# Altium PCB Video.PcbDoc
Units mm, origin at the board's own origin, x right, y up, seen from the top; angles counter-clockwise.
Board outline 68.58 x 35.56 mm, 4 copper layers (Top Layer, Signal Layer 1, Signal Layer 2, Bottom Layer), stack 0.603 mm thick; 43 components, 26 nets, 145 pads, 8 vias.
Unrouted connection lines stored in the file: 4.
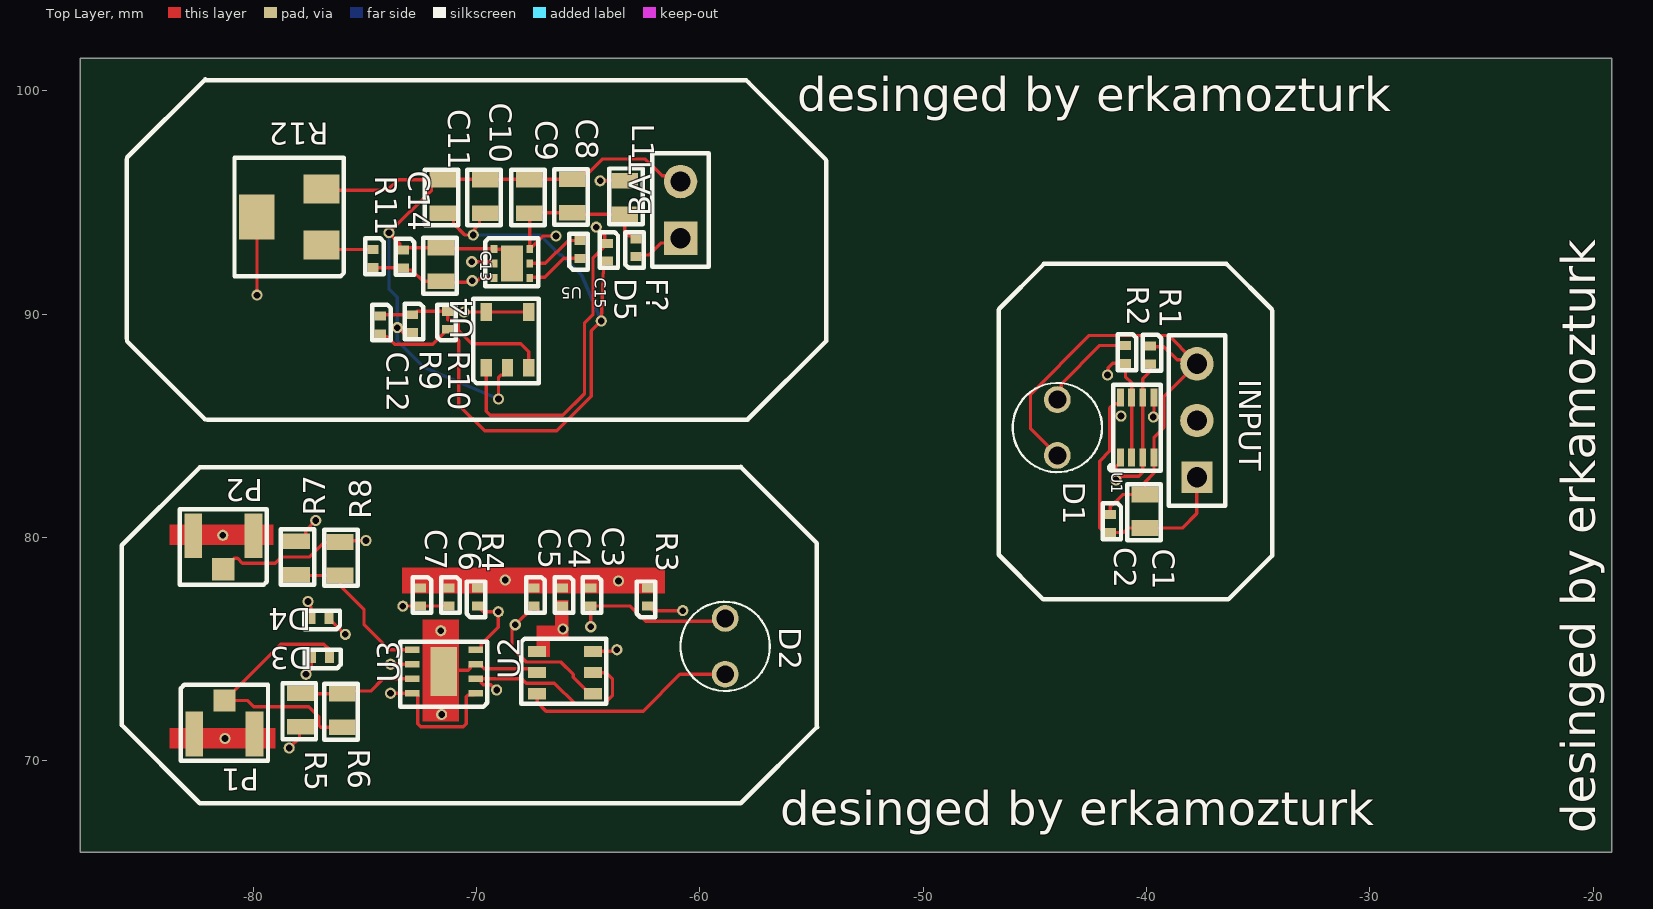
[diagram p0: Top Layer view]
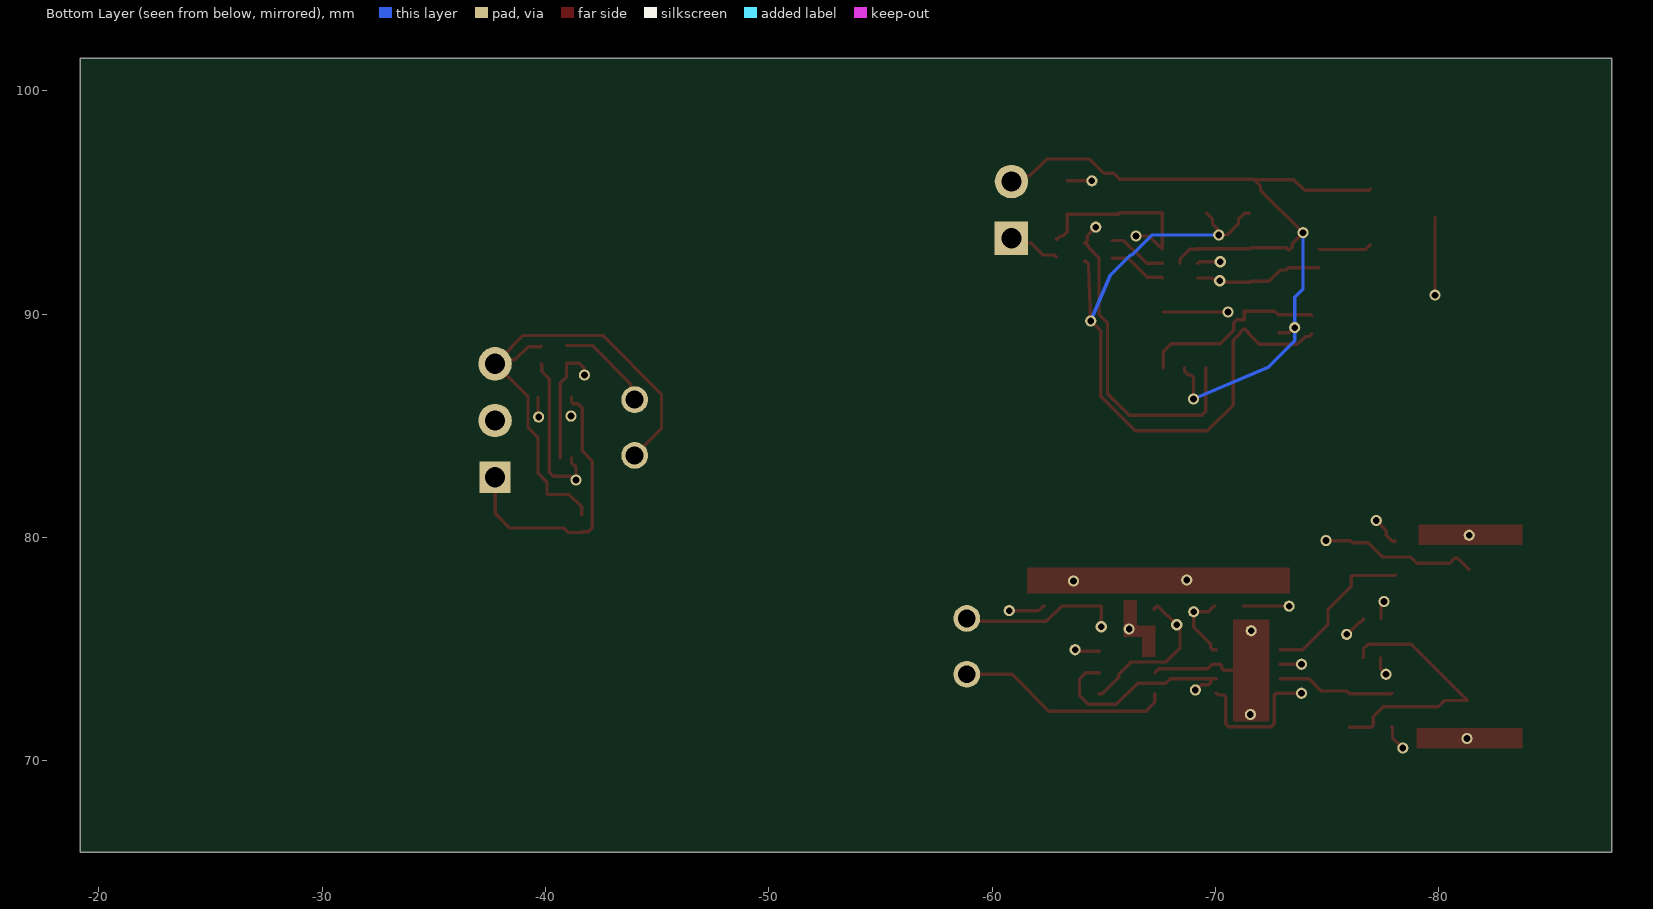
[diagram p1: Bottom Layer view, seen from below]
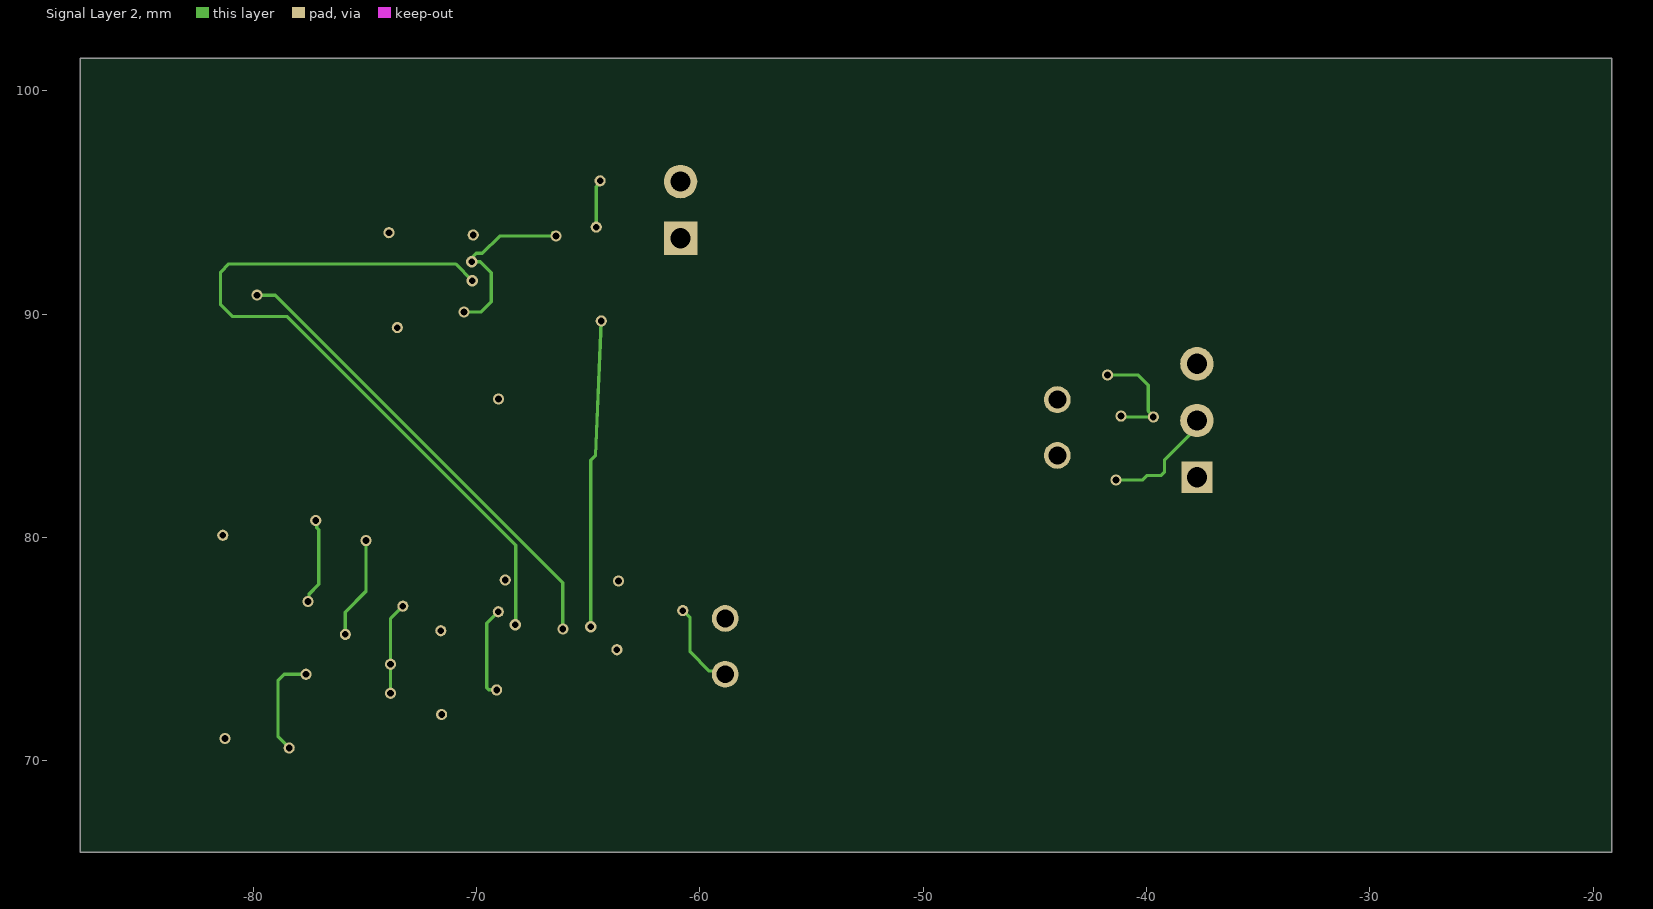
[diagram p2: Signal Layer 2]
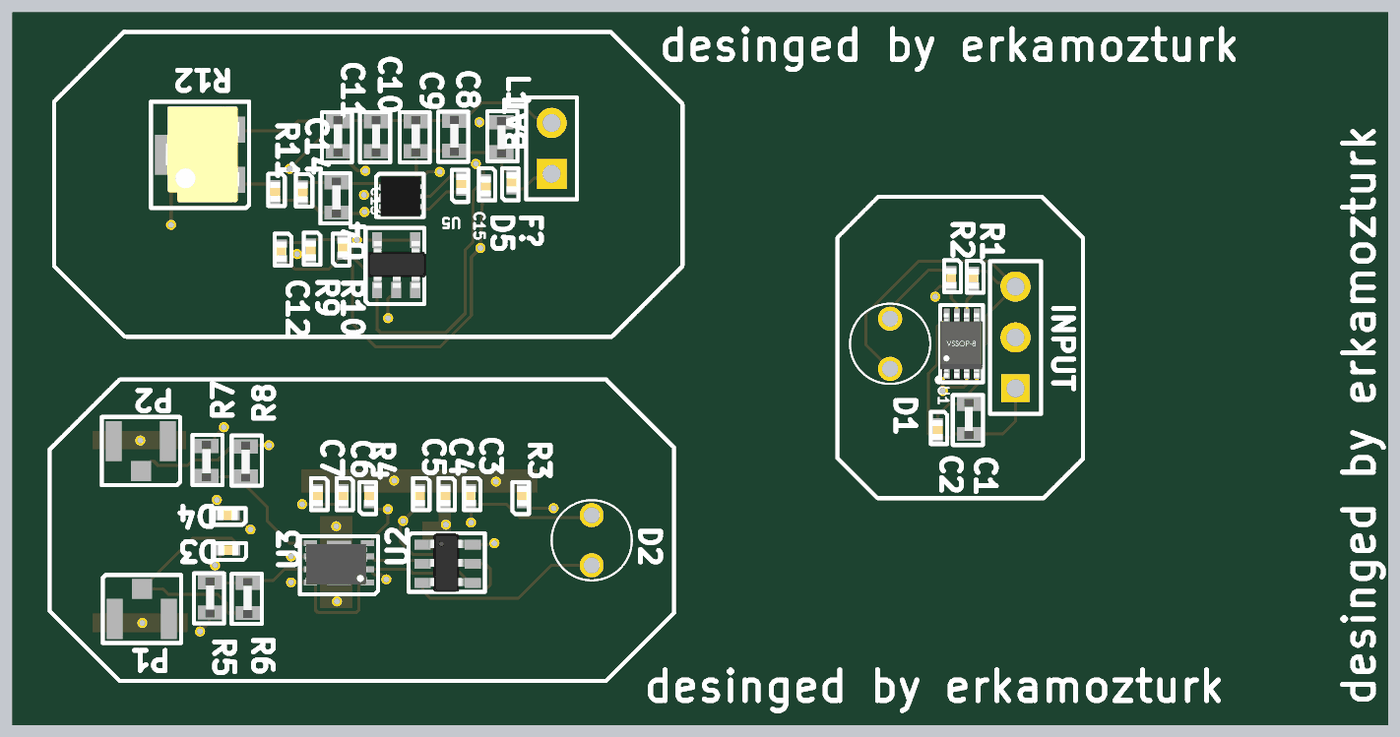
[diagram p3: 3D render of the assembled board from above, using the file's embedded part models]

## Layer stack, top to bottom
Top Solder: solder mask 0.0102, Solder Resist, Dk 3.5
Top Layer: signal copper 0.0356
Dielectric 1: prepreg 0.0711, PP-006, Dk 4.1
Signal Layer 1: signal copper 0.035
Dielectric 2: dielectric 0.32, FR-4, Dk 4.8
Signal Layer 2: signal copper 0.035
Dielectric 3: prepreg 0.0711, PP-006, Dk 4.1
Bottom Layer: signal copper 0.0356
Bottom Solder: solder mask 0.0102, Solder Resist, Dk 3.5

## Board outline
-87.75,65.9 -87.75,101.46 -19.17,101.46 -19.17,65.9

## Design rules (kind name [scope] priority, off if disabled: settings)
AssemblyTestPointUsage [All] p1 off:
AssemblyTestpoint [All] p1 off: testpointundercomponent=TRUE minsize=1.016 maxsize=2.54 preferedsize=1.524 minholesize=0 maxholesize=1.016 preferedholesize=0.813 testpointgrid=0.025 usegrid=TRUE gridtolerance=0 allowsidetop=TRUE allowsidebottom=TRUE
Clearance [All] p1: gap=0.15 ignorepadtopadclearanceinfootprint=FALSE
ComponentClearance [All] p1 off: gap=0.254 collisioncheckmode=3 verticalgap=0.254 showdistances=FALSE
DiffPairsRouting [All] p1 off: maxlimit=0.254 minlimit=0.254 mostfreqgap=0.254 toplayer_minwidth=0.381 toplayer_maxwidth=0.381 toplayer_prefwidth=0.381 midlayer1_minwidth=0.381 midlayer1_maxwidth=0.381 midlayer1_prefwidth=0.381 midlayer2_minwidth=0.381 midlayer2_maxwidth=0.381 midlayer2_prefwidth=0.381 bottomlayer_minwidth=0.381 bottomlayer_maxwidth=0.381 bottomlayer_prefwidth=0.381 maxuncoupledlength=12.7
FabricationTestPointUsage [All] p1 off: valid=0 allowmultiple=FALSE
FabricationTestpoint [All] p1 off: side=3 testpointundercomponent=TRUE minsize=1.016 maxsize=2.54 preferedsize=1.524 minholesize=0 maxholesize=1.016 preferedholesize=0.813 testpointgrid=0.025 allowsidetop=TRUE allowsidebottom=TRUE usegrid=TRUE gridtolerance=0
FanoutControl Fanout_BGA [IsBGA] p1 off: bgadir=Out bgaviamode=Centered fanoutstyle=Auto fanoutdirection=Alternating viagrid=0.025 // Fanout_BGA (Default Rule)
FanoutControl Fanout_LCC [IsLCC] p2 off: bgadir=Out bgaviamode=Centered fanoutstyle=Auto fanoutdirection=Alternating viagrid=0.025 // Fanout_LCC (Default Rule)
FanoutControl Fanout_SOIC [IsSOIC] p3 off: bgadir=Out bgaviamode=Centered fanoutstyle=Auto fanoutdirection=Alternating viagrid=0.025 // Fanout_SOIC (Default Rule)
FanoutControl Fanout_Small [(CompPinCount < 5)] p4 off: bgadir=Out bgaviamode=Centered fanoutstyle=Auto fanoutdirection=OutThenIn viagrid=0.025 // Fanout_Small (Default Rule)
FanoutControl Fanout_Default [All] p5 off: bgadir=Out bgaviamode=Centered fanoutstyle=Auto fanoutdirection=Alternating viagrid=0.025 // Fanout_Default (Default Rule)
Height [All] p1 off: minheight=0 maxheight=25.4 prefheight=12.7
HoleSize [All] p1 off: absolutevalues=TRUE maxlimit=2.54 minlimit=0.025 maxpercent=80.000 minpercent=20.000
HoleToHoleClearance [All] p1 off: gap=0.254 allowstackedmicrovias=TRUE
LayerPairs [All] p1 off: enforce=TRUE
MinimumSolderMaskSliver [All] p1 off: minsoldermaskwidth=0.254
NetAntennae [All] p1 off: netantennaetolerance=0
PasteMaskExpansion [All] p1 off: expansion=0
PlaneClearance [All] p1 off: clearance=0.508
PlaneConnect [All] p1 off: planeconnectstyle=Direct reliefexpansion=0.508 reliefentries=4 reliefconductorwidth=0.254 reliefairgap=0.254
PolygonConnect [All] p1: connectstyle=Relief reliefconductorwidth=0.254 reliefentries=4 polygonreliefangle="90 Angle" airgapwidth=0.254
RoutingCorners [All] p1 off: cornerstyle=45-Degree minsetback=2.54 maxsetback=2.54
RoutingLayers [All] p1 off: top layer_v5=TRUE mid layer 1_v5=TRUE mid layer 2_v5=TRUE bottom layer_v5=TRUE
RoutingPriority [All] p1 off: routingpriority=0
RoutingTopology [All] p1 off: topology=Shortest
RoutingVias [All] p1: holewidth=0.3 width=0.5 viastyle="Through Hole" minholewidth=0.3 minwidth=0.5 maxholewidth=0.2 maxwidth=0.8
SilkToSilkClearance [All] p1 off: silktosilkclearance=0.254
SilkToSolderMaskClearance [IsPad] p1 off: minsilkscreentomaskgap=0.254 clearancetoexposedcopper=TRUE
SolderMaskExpansion [All] p1 off: expansion=0
UnpouredPolygon [All] p1 off:
Width [All] p1: maxlimit=0.5 minlimit=0.15 preferedwidth=0.15
3 further rules are at their usual default settings.

## Components (designator, comment, footprint, x,y, rotation, side; value= is the part's Value field where it differs from the comment)
BAT "P1" HDR1X2 -60.87,93.4 r90 top
C1 "Cap" 0805-FW -40.07,81.176 r270 top value=100pF
C2 "Cap" 0402 -41.62,80.625 r270 top value=100pF
C3 "Cap" 0402 -64.89,77.33 r270 top value=100pF
C4 "Cap" 0402 -66.16,77.33 r270 top value=100pF
C5 "Cap" 0402 -67.43,77.33 r270 top value=100pF
C6 "Cap" 0402 -71.24,77.33 r270 top value=100pF
C7 "Cap" 0402 -72.51,77.33 r270 top value=100pF
C8 "Cap" 0805-FW -65.72,95.3 r270 top value=100pF
C9 "Cap" 0805-FW -67.645,95.275 r270 top value=100pF
C10 "Cap" 0805-FW -69.62,95.275 r270 top value=100pF
C11 "Cap" 0805-FW -71.52,95.275 r270 top value=100pF
C12 "Cap" 0402 -74.32,89.526 r270 top value=100pF
C13 "Cap" 0805-FW -71.595,92.225 r270 top value=100pF
C14 "Cap" 0402 -73.27,92.475 r270 top value=100pF
C15 "Cap" 0402 -65.37,92.9 r90 top value=100pF
D1 "LED0" T1 -43.995,86.175 r270 top
D2 "Photo Sen" T1 -58.87,73.875 r90 top
D3 "Diode" 0402 -76.995,74.625 r180 top
D4 "Diode" 0402 -77.02,76.375 r180 top
D5 "Diode" 0402 -64.145,92.775 r270 top
F? "Fuse 1" 0402 -62.87,92.975 r90 top
INPUT "Header 3" HDR1X3 -37.745,82.7 r90 top
L1 "Inductor" 0805-FW -63.367,95.225 r90 top value=10mH
P1 "BNC" UFL -83.045,72.2 r0 top
P2 "BNC" UFL -79.595,79.075 r180 top
R1 "Res2" 0402 -39.82,88.175 r270 top value=1K
R2 "Res2" 0402 -40.945,88.2 r270 top value=1K
R3 "Res2" 0402 -62.35,77.33 r90 top value=1K
R4 "Res2" 0402 -69.97,77.33 r90 top value=1K
R5 "Res2" 0805-FW -77.895,72.275 r270 top value=1K
R6 "Res2" 0805-FW -76.02,72.25 r270 top value=1K
R7 "Res2" 0805-FW -78.07,79.076 r90 top value=1K
R8 "Res2" 0805-FW -76.12,79.05 r90 top value=1K
R9 "Res2" 0402 -72.87,89.576 r270 top value=1K
R10 "Res2" 0402 -71.295,89.726 r90 top value=1K
R11 "Res2" 0402 -74.645,92.5 r270 top value=1K
R12 "RPot" PVG5A -76.145,92.45 r180 top value=1K
U1 "74LVC3G0" DUC8 -41.32,83.175 r90 top
U2 "TLV2501" SOT236 -67.295,74.9 r0 top
U3 "UCC275" DFN8 -69.72,72.875 r180 top
U4 "LMR62421" SOT235 -69.57,87.6 r90 top
U5 "TPS60150" DFN6 -69.345,93.1 r0 top

## Footprints (in the part's own frame and the unit in brackets; to place one, negate y for a bottom-side part, rotate by r counter-clockwise, add the part's x,y. Pads: shape width x height; smd on the part's side, far side on the other; paste and mask are expansions set on the pad)
0402 [mm]
  rect 0.4x0.5 smd mask+0: 1(-0.4,0) 2(0.4,0)
  silkscreen extent -0.9,-0.35 0.7,0.48, body extent -0.5,-0.25 0.5,0.25, height 0.55
0805-FW [mm]
  rect 0.7x1.2 smd mask+0: 1(-0.75,0) 2(0.75,0)
  silkscreen extent -1.2,-0.8 1.3,0.7, body extent -1,-0.23 1,0.23, height 1.23
DFN6 [mm]
  rect 0.3x0.35 smd: 1(0.125,-0.175) 2(0.125,-0.825) 3(0.125,-1.475) 4(1.725,-1.475) 5(1.725,-0.825) 6(1.725,-0.175)
  rect 1x1.6 smd paste+0 mask+0: 1(0.925,-0.825)
  silkscreen extent -0.28,-1.85 2.1,0.3, body extent -0.11,-1.84 1.98,0.16, height 0.81
DFN8 [mm]
  rect 1.2x2.2 smd: 0(1.75,-1.125)
  rect 0.65x0.3 smd: 1(0.325,-0.15) 2(0.325,-0.8) 3(0.325,-1.45) 4(0.325,-2.1) 5(3.175,-2.1) 6(3.175,-1.45) 7(3.175,-0.8) 8(3.175,-0.15)
  silkscreen extent -0.2,-2.45 3.7,0.45, body extent 0.37,-2.05 3.41,-0.05, height 0.91
DUC8 [mm]
  rect 0.8x0.3 smd mask+0.07: 1(0.4,-0.15) 2(0.4,-0.65) 3(0.4,-1.15) 4(0.4,-1.65) 5(3.1,-1.65) 6(3.1,-1.15) 7(3.1,-0.65) 8(3.1,-0.15)
  silkscreen extent -0.18,-1.95 3.67,0.35, body extent 0.08,-1.93 3.28,0.17, height 0.91
HDR1X2 [mm] "Connector; Header; 2 Position"
  rect 1.5x1.5 hole 0.9: 1(0,0)
  round 1.5 hole 0.9: 2(2.54,0)
  silkscreen extent -1.27,-1.27 3.81,1.27
HDR1X3 [mm] "Connector; Header; 3 Position"
  rect 1.4x1.4 hole 0.9: 1(0,0)
  round 1.5 hole 0.9: 2(2.54,0) 3(5.08,0)
  silkscreen extent -1.27,-1.27 6.35,1.27
PVG5A [mm] "TRIM POT"
  rect 1.6x1.3 smd: 1(0.8,-0.65) 2(0.8,-3.15)
  rect 1.6x2 smd: 3(3.7,-1.9)
  silkscreen extent -0.2,-4.55 4.7,0.75, body extent 0.28,-4.33 3.97,0.47, height 5.61
SOT235 [mm]
  rect 0.8x0.5 smd: 1(0,0) 2(0,-0.95) 3(0,-1.9) 4(2.5,-1.9) 5(2.5,0)
  silkscreen extent -0.7,-2.35 3.1,0.58, body extent 0.1,-2.44 2.44,0.48, height 1.01
SOT236 [mm]
  rect 0.8x0.5 smd: 1(0,0) 2(0,-0.95) 3(0,-1.9) 4(2.5,-1.9) 5(2.5,-0.95) 6(2.5,0)
  silkscreen extent -0.7,-2.35 3.1,0.58, body extent 0,-2.36 2.34,0.56
T1 [mm] "3mm 5mm r=1.5 w=0.1"
  round 1.2 hole 0.8: 1(0,0) 2(2.5,0)
  silkscreen extent -0.75,-2 3.25,2
UFL [mm]
  rect 1x1 smd: 1(1.75,0.5)
  rect 0.8x2 smd: 2(0.4,-1) 2(3.1,-1)
  silkscreen extent -0.2,-2.2 3.7,1.2

## Part data
BAT: library part "Header 2", "Header, 2-Pin", LatestRevisionDate=17-Jul-2002, LatestRevisionNote="Re-released for DXP Platform.", Publisher="Altium Limited"
C1 C2 C3 C4 C5 C6 C7 C8 C9 C10 C11 C12 C13 C14 C15: "Capacitor", LatestRevisionDate=17-Jul-2002, LatestRevisionNote="Re-released for DXP Platform.", PackageDescription="Radial Cap, Thru-Hole; 2 Leads; 0.3 in Pin Spacing", PackageReference=RAD-0.3, Published=8-Jun-2000, Publisher="Altium Limited"
D1: "Typical INFRARED GaAs LED", LatestRevisionDate=08-Jul-2005, LatestRevisionNote="Mech Layer 1 removed.", PackageDescription="LED; 2 Leads", PackageReference=LED-0, Published=8-Jun-2000, Publisher="Altium Limited"
D2: "Photosensitive Diode", LatestRevisionDate=17-Jul-2002, LatestRevisionNote="Re-released for DXP Platform.", PackageReference=PIN2, Published=24-Mar-1999, Publisher="Altium Limited"
D3 D4 D5: "Default Diode", Code_JEDEC=DO-214-AB, LatestRevisionDate=17-Jul-2002, LatestRevisionNote="Re-released for DXP Platform.", PackageDescription="DO-214-AB/SMC; 2 C-Bend Leads; Body 7.9 x 5.9 mm, inc. leads (LxW)", PackageReference=SMC, PackageVersion=Sep-1996, Published=8-Jun-2000, Publisher="Altium Limited"
F?: "Fuse", LatestRevisionDate=17-Jul-2002, LatestRevisionNote="Re-released for DXP Platform.", PackageDescription="Thru-Hole; 2 Leads", PackageReference=PIN-W2/E2.8, Published=8-Jun-2000, Publisher="Altium Limited"
INPUT: "Header, 3-Pin", LatestRevisionDate=17-Jul-2002, LatestRevisionNote="Re-released for DXP Platform.", Publisher="Altium Limited"
P1 P2: "BNC Elbow Connector", LatestRevisionDate=17-Jul-2002, LatestRevisionNote="Re-released for DXP Platform.", Publisher="Altium Limited"
R1 R2 R3 R4 R5 R6 R7 R8 R9 R10 R11: "Resistor", LatestRevisionDate=17-Jul-2002, LatestRevisionNote="Re-released for DXP Platform.", PackageDescription="Axial Device, Thru-Hole; 2 Leads; 0.4 in Pin Spacing", PackageReference=AXIAL-0.4, Published=8-Jun-2000, Publisher="Altium Limited"
R12: "Potentiometer", LatestRevisionDate=17-Jul-2002, LatestRevisionNote="Re-released for DXP Platform.", PackageDescription="Variable Resistor, Thru-Hole; 3 Leads", PackageReference=VR5, Published=8-Jun-2000, Publisher="Altium Limited", Set Position=0.5, Sim Note="Enter the Resistance value and the set point into parameter fields."
L1: Code_IEC=1005, Code_JEITA=0402, LatestRevisionDate=29-May-2009, LatestRevisionNote="IPC-7351 Footprint Added.", PackageDescription="Chip Inductor", PackageReference=0402-A, Published=8-Jun-2000, Publisher="Altium Limited"

## Free pads (board coordinates)
  round 0.5 hole 0.3: 2(-81.37,80.1) 2(-81.27,71) 2(-78.395,70.575) 2(-77.645,73.875) 2(-77.556,77.138) 2(-77.206,80.763) 2(-75.881,75.663) 2(-74.956,79.863) 2(-73.929,93.65) 2(-73.856,73.025) 2(-73.856,74.325) 2(-73.554,89.4) 2(-73.306,76.925) 2(-71.606,75.825) 2(-71.57,72.075) 2(-70.154,93.55) 2(-69.106,73.175) 2(-69.031,76.675) 2(-69.02,86.204) 2(-68.72,78.1) 2(-64.645,93.9) 2(-64.47,95.975) 2(-64.42,89.7) 2(-63.72,74.975) 2(-63.645,78.05) 2(-60.77,76.725) 2(-41.745,87.275) 2(-41.37,82.575) 2(-41.145,85.438) 2(-39.695,85.4)

## Via types
v1: diameter 0.5, hole 0.3, Top Layer to Bottom Layer, 8 vias

## Nets (pads, with @x,y where several pads share a name; then routed paths per layer and width w, separated by ;. In a path a pad name is that pad's centre, name@x,y a point inside that pad or via, vN(x,y) a via of type N, cw(c..) or ccw(c..) an arc to the next point about the centre after c; other vN are vias at no path point)
5V: C5.2 C13.2 C14.2 R11.2 U2.4 U5.3 | length 47.1
  Top Layer w0.15: R11.2 -74.62,92.075 C14.2 -73.173,91.979 -72.898,91.979 -72.395,91.475 C13.2 -71.545,91.425 v1@-70.195,91.425 ; v1@-70.045,91.425 -69.845,91.625 U5.3 ; v1@-68.42,76.09 -68.42,75.057 -67.788,74.425 -66.238,74.425 -65.679,73.866 -65.679,73.735 -64.945,73 U2.4 ; v1(-68.27,76.09) C5.2 -67.38,76.93 -67.255,76.805 C5.2@-67.255,76.755
  Signal Layer 2 w0.15: v1(-70.195,91.5) -70.945,92.25 -81.095,92.25 -81.47,91.875 -81.47,90.425 -80.945,89.9 -78.494,89.9 -68.245,79.651 -68.245,76.115 v1(-68.27,76.09)
15V: C3.2 C10.2 C11.2 C12.2 D2.2 D5.2 pad.2@-64.42,89.7 pad.2@-70.154,93.55 R10.1 | length 52.5
  Top Layer w0.15: C12.2 -74.195,89.001 -74.02,89.001 -73.67,88.65 -71.97,88.65 -71.47,89.151 -71.47,89.201 -71.345,89.326 R10.1 -71.245,89.326 -71.12,89.201 -71.12,89.151 -70.795,88.826 -70.795,85.925 -69.645,84.775 -66.42,84.775 -64.87,86.325 -64.87,89.25 -64.42,89.7 -64.32,92.11 -64.32,92.25 -64.195,92.375 D5.2 ; C11.2 -71.311,94.525 -71.036,94.25 -71.036,94.041 -70.545,93.55 -70.154,93.55 -70.087,93.617 -70.087,93.833 -69.87,94.05 -69.87,94.275 C10.2 ; v1(-64.89,76.005) C3.2 -63.118,76.93 -62.438,76.25 -58.995,76.25 D2.2
  Signal Layer 2 w0.15: v1(-64.89,76.005) -64.89,83.455 -64.679,83.666 pad.2@-64.42,89.7
  Bottom Layer w0.15: pad.2@-70.154,93.55 -67.167,93.55 -66.267,92.65 -66.195,92.65 -65.295,91.75 pad.2@-64.42,89.7
all_As: INPUT.2 pad.2@-41.37,82.575 R1.2 U1.1 U1.3 U1.6 | length 13
  Top Layer w0.15: U1.1 -41.17,83.325 -41.245,83.25 -41.282,83.25 -41.37,83.163 -41.37,82.575 -41.282,82.575 -41.107,82.75 -40.345,82.75 -40.17,82.925 U1.3 U1.6 -40.17,87.1 -39.832,87.438 -39.832,87.763 R1.2 ; INPUT.2@-37.745,84.925 INPUT.2
  Signal Layer 2 w0.15: pad.2@-41.37,82.575 -40.195,82.575 -39.995,82.775 -39.37,82.775 -39.195,82.95 -39.195,83.475 -37.745,84.925 INPUT.2
all_Ys: pad.2@-39.695,85.4 pad.2@-41.145,85.438 pad.2@-41.745,87.275 R2.2 U1.2 U1.5 U1.7 | length 11.4
  Top Layer w0.15: pad.2@-41.745,87.275 -41.709,87.311 -41.709,87.611 -41.52,87.8 R2.2 -40.945,87.201 -40.67,86.926 U1.7 U1.2 ; pad.2@-39.695,85.4 -39.67,85.425 U1.5
  Signal Layer 2 w0.15: pad.2@-41.745,87.275 -40.37,87.275 -39.92,86.825 -39.92,85.663 -39.695,85.438 -39.695,85.4 -41.107,85.4 pad.2@-41.145,85.438
Bat: C8.2 C9.2 F?.2 L1.1 U4.4 U4.5 U5.2 U5.6 | length 21.1
  Top Layer w0.15: v1(-70.57,90.1) U4.5 U4.4 ; v1(-70.22,92.35) -69.295,92.35 U5.2 ; U5.6 U5.6@-67.62,92.95 ; v1(-66.445,93.5) -67.045,93.5 -67.52,93.025 -67.545,93.025 U5.6@-67.62,92.95 ; F?.2 -62.895,93.35 -63.045,93.5 -63.167,93.5 -63.367,93.7 L1.1 -65.645,94.475 C8.2 -67.62,94.55 C9.2 -67.62,94.5 U5.6@-67.62,92.95
  Signal Layer 2 w0.15: v1(-70.57,90.1) -69.795,90.1 -69.345,90.55 -69.345,91.85 -69.845,92.35 v1(-70.22,92.35) -70.153,92.417 -70.153,92.592 -70.02,92.725 -69.745,92.725 -68.97,93.5 v1(-66.445,93.5) v1@-66.595,93.65
FB: C12.1 R9.1 R10.2 U4.3 | length 8.6
  Top Layer w0.15: C12.1 -74.27,89.976 R9.1 -72.82,89.976 -72.67,90.126 R10.2 -71.295,89.751 -70.952,89.751 -70.82,89.619 -70.82,89.275 -70.22,88.675 -68.02,88.675 -67.67,88.325 U4.3
GND: C3.1 C4.1 C5.1 C6.1 C7.1 P1.2 P2.2 pad.2@-63.72,74.975 pad.2@-63.645,78.05 pad.2@-68.72,78.1 pad.2@-71.57,72.075 pad.2@-71.606,75.825 pad.2@-81.27,71 pad.2@-81.37,80.1 R3.2 R4.2 U2.2 U2.6 U3.0 U3.3 | length 6.1
  Top Layer w0.15: pad.2@-71.606,75.825 -71.606,75.731 -71.47,75.594 ; U3.0@-71.57,73.9 U3.0 -71.42,74.05 -70.383,74.05 -70.295,74.138 -70.295,74.25 -70.22,74.325 -69.87,74.325 -69.67,74.125 -67.47,74.125 U2.2 ; U2.6 -63.89,74.9 -63.815,74.975 pad.2@-63.72,74.975
Ind2SW: D5.1 L1.2 pad.2@-64.47,95.975 pad.2@-64.645,93.9 U4.1 | length 18.2
  Top Layer w0.15: U4.1 -69.57,85.651 -69.394,85.475 -66.144,85.475 -65.17,86.45 -65.17,89.622 -64.789,90.003 -64.789,92.531 -64.32,93 -64.32,93.05 -64.195,93.175 D5.1 -64.257,93.288 -64.257,93.513 pad.2@-64.645,93.9 ; pad.2@-64.47,95.975 L1.2
  Signal Layer 2 w0.15: pad.2@-64.645,93.9 -64.645,95.713 -64.47,95.888 pad.2@-64.47,95.975
Led_Driver: D1.1 R2.1 | length 4.4
  Top Layer w0.15: D1.1 -43.824,86.346 -43.824,86.871 -42.095,88.6 R2.1
NetBAT_1: BAT.1 F?.1 | length 2.3
  Top Layer w0.15: F?.1 -62.795,92.65 -62.295,92.65 -61.757,93.188 -61.082,93.188 BAT.1
NetBAT_2: BAT.2 C8.1 C9.1 C10.1 C11.1 C13.1 C14.1 pad.2@-69.02,86.204 pad.2@-73.554,89.4 pad.2@-73.929,93.65 R9.2 R12.2 U4.2 U5.1 | length 39.5
  Top Layer w0.15: R12.2 -76.895,95.55 -73.995,95.55 -73.52,96.025 C11.1@-71.746,96.025 ; pad.2@-73.554,89.4 -73.516,89.4 -73.291,89.176 R9.2 ; pad.2@-69.02,86.204 -69.02,87.188 -68.932,87.275 -68.795,87.275 -68.62,87.45 U4.2 ; U5.1@-68.42,92.275 -68.42,92.487 -68.845,92.912 -69.207,92.912 -69.22,92.925 -71.545,92.925 C13.1 -73.17,92.975 C14.1 -73.32,92.875 -73.445,93 -73.445,93.166 -73.929,93.65 -72.021,95.558 -72.021,95.75 C11.1@-71.746,96.025 ; BAT.2 -61.127,96.197 -61.692,96.197 -62.445,96.95 -64.37,96.95 -65.011,96.31 -65.461,96.31 C8.1 -71.721,96.05 C11.1@-71.746,96.025
  Bottom Layer w0.15: pad.2@-73.929,93.65 -73.929,91.135 -73.554,90.76 -73.554,89.4 -73.554,88.81 -72.37,87.625 pad.2@-69.02,86.204
NetC1_1: C1.1 C2.1 D1.2 INPUT.3 R1.1 U1.4 | length 23.5
  Top Layer w0.15: D1.2@-43.895,83.675 D1.2 -45.195,84.875 -45.195,86.425 -42.57,89.05 -39.015,89.05 INPUT.3@-37.927,87.963 ; C2.1 -41.62,81.375 -41.07,81.926 C1.1 -40.07,82.475 -39.67,82.875 U1.4 -39.67,84.475 -39.22,84.925 -39.22,86.305 INPUT.3 INPUT.3@-37.927,87.963 ; R1.1 -39.795,88.55 -39.22,88.55 -38.632,87.963 INPUT.3@-37.927,87.963
NetC15_1: C15.1 U5.4 | length 2.6
  Top Layer w0.15: U5.4 -67.595,91.65 -66.945,91.65 -66.095,92.5 C15.1
NetC15_2: C15.2 U5.5 | length 2.7
  Top Layer w0.15: U5.5 -66.92,92.275 -65.895,93.3 C15.2
NetD3_1: D3.1 P1.1 R6.2 | length 12.2
  Top Layer w0.15: D3.1 -76.632,74.663 -76.632,75.013 -76.845,75.225 -78.77,75.225 P1.1 -80.258,72.701 -79.983,72.425 -77.527,72.425 -77.07,71.969 -77.07,71.588 -76.982,71.5 R6.2
NetD3_2: D3.2 pad.2@-77.645,73.875 pad.2@-78.395,70.575 R5.2 | length 6.6
  Top Layer w0.15: pad.2@-78.395,70.575 -77.932,71.038 -77.932,71.488 R5.2 ; pad.2@-77.645,73.875 -77.645,73.888 -77.395,74.138 D3.2
  Signal Layer 2 w0.15: pad.2@-78.395,70.575 -78.895,71.075 -78.895,73.6 -78.62,73.875 pad.2@-77.645,73.875
NetD4_1: D4.1 P2.1 pad.2@-74.956,79.863 pad.2@-75.881,75.663 R8.2 | length 12.8
  Top Layer w0.15: P2.1 -80.85,79.07 -80.708,79.07 -80.488,78.85 -79.026,78.85 -78.751,79.125 -77.502,79.125 -76.857,79.77 -76.15,79.77 R8.2 -76.057,79.863 pad.2@-74.956,79.863 ; D4.1 -76.62,76.325 -76.495,76.2 -76.445,76.2 -75.907,75.663 pad.2@-75.881,75.663
  Signal Layer 2 w0.15: pad.2@-75.881,75.663 -75.881,76.664 -74.956,77.589 pad.2@-74.956,79.863
NetD4_2: D4.2 pad.2@-77.206,80.763 pad.2@-77.556,77.138 R7.2 | length 6.1
  Top Layer w0.15: R7.2 -77.932,79.826 -77.657,80.101 -77.657,80.313 pad.2@-77.206,80.763 ; pad.2@-77.556,77.138 -77.556,77.043 -77.42,76.907 D4.2
  Signal Layer 2 w0.15: pad.2@-77.556,77.138 -77.509,77.186 -77.509,77.462 -77.07,77.9 -77.07,80.35 -77.159,80.439 -77.159,80.715 pad.2@-77.206,80.763
NetR11_1: R11.1 R12.1 | length 2.4
  Top Layer w0.15: R12.1 -76.745,92.9 R11.1
Out_TLV2501: pad.2@-69.031,76.675 pad.2@-69.106,73.175 R4.1 U2.5 U3.2 U3.4 | length 16.9
  Top Layer w0.15: U3.2 U3.2@-69.87,73.675 ; U3.4 -69.873,74.975 -69.798,75.05 -69.798,75.222 -69.031,75.989 -69.031,76.675 -69.707,76.675 -69.795,76.763 -69.795,76.805 -69.92,76.93 R4.1 ; pad.2@-69.106,73.175 -69.144,73.175 -69.369,73.4 -69.707,73.4 -69.795,73.488 -69.795,73.6 U3.2@-69.87,73.675 ; U2.5 -64.195,73.95 -63.92,73.675 -63.92,72.907 -64.302,72.525 -65.57,72.525 -66.52,73.475 -67.788,73.475 -67.988,73.675 -69.795,73.675 U3.2@-69.87,73.675
  Signal Layer 2 w0.15: pad.2@-69.106,73.175 -69.457,73.175 -69.545,73.263 -69.545,76.162 pad.2@-69.031,76.675
OutA_UCC275: R5.1 R6.1 U3.7 | length 5.3
  Top Layer w0.15: R5.1 -77.87,73 R6.1 -75.895,73.125 -74.745,73.125 -74.195,73.675 U3.7
OutB_UCC275: R7.1 R8.1 U3.5 | length 7.2
  Top Layer w0.15: R7.1 -78.045,78.301 R8.1 -76.083,78.263 -76.083,77.813 -75.045,76.775 -75.045,76.1 -73.92,74.975 U3.5
Photo_Sen: D2.1 pad.2@-60.77,76.725 R3.1 U2.3 | length 15.3
  Top Layer w0.15: U2.3 -67.283,72.988 -67.283,72.613 -66.895,72.225 -62.545,72.225 -60.895,73.875 D2.1 ; R3.1 -62.3,76.93 -62.095,76.725 pad.2@-60.77,76.725
  Signal Layer 2 w0.15: pad.2@-60.77,76.725 -60.445,76.4 -60.445,74.875 -59.591,74.021 -59.016,74.021 D2.1
REF: C4.2 R12.3 U2.1 | length 24.6
  Top Layer w0.15: R12.3 -79.84,94.345 v1(-79.84,90.855) ; C4.2@-66.177,76.913 C4.2
  Signal Layer 2 w0.15: v1(-79.84,90.855) -79.025,90.855 -66.14,77.97 v1(-66.14,75.905)
Vcc_74LVC3G0: C1.2 C2.2 INPUT.1 U1.8 | length 12.8
  Top Layer w0.15: U1.8 -41.17,86.066 -41.245,85.991 -41.454,85.991 -41.645,85.8 -41.645,83.875 -42.095,83.425 -42.095,80.438 -41.919,80.263 -41.657,80.263 C2.2 -41.02,80.225 -40.82,80.426 C1.2 -38.395,80.426 -37.745,81.075 INPUT.1
Vcc_UCC275: C6.2 C7.2 pad.2@-73.306,76.925 pad.2@-73.856,73.025 pad.2@-73.856,74.325 U3.1 U3.6 U3.8 | length 13.7
  Top Layer w0.15: pad.2@-73.856,73.025 U3.8 -72.72,73.025 -72.645,72.95 -72.645,71.657 -72.513,71.525 -70.602,71.525 -70.47,71.657 -70.47,72.863 -70.382,72.95 -70.12,72.95 U3.1 ; pad.2@-73.856,74.325 U3.6 ; pad.2@-73.306,76.925 -73.301,76.93 C7.2 C6.2
  Signal Layer 2 w0.15: pad.2@-73.856,73.025 -73.856,74.325 -73.856,76.375 pad.2@-73.306,76.925

## Polygon pours and split planes (outlines as drawn)
GND on Signal Layer 1 "Signal Layer 1-GND" (solid, pour order 6): -57.095,69.125 -82.845,69.125 -82.845,99.35 -82.62,99.575 -56.789,99.575
GND on Signal Layer 1 "Signal Layer 1-GND 1" (solid, pour order 10): -92.095,77.1
GND on Signal Layer 1 "Signal Layer 1-GND 2" (solid, pour order 8): -91.72,77.675
GND on Signal Layer 1 "Signal Layer 1-GND 3" (solid, pour order 4): -57.945,69.825

## Other copper
Top Layer:
  region net REF: -67.32,76.025 -67.32,74.65 -66.72,74.65 -66.72,76.025
  region net REF: -66.495,77.2 -66.495,75.6 -65.895,75.6 -65.895,77.2
  region net REF: -65.895,76.051 -67.32,76.051 -67.32,75.551 -65.895,75.551
  region net GND: -70.795,76.325 -72.42,76.325 -72.42,71.75 -70.795,71.75
  region net GND: -79.02,71.475 -83.745,71.475 -83.745,70.55 -79.02,70.55
  region net GND: -79.095,80.575 -83.745,80.575 -83.745,79.675 -79.095,79.675
  region net GND: -61.57,78.651 -73.34,78.651 -73.34,77.501 -61.57,77.501

## Silkscreen, mask and mechanical layers (free items; w line width, h text height)
Top Overlay:
  lines w0.2: -85.67,88.9 -85.67,96.95 ; -85.657,88.788 -82.17,85.301 ; -85.645,97.025 -82.157,100.513 ; -82.407,83.138 -85.895,79.65 -85.895,71.6 -82.395,68.1 ; -82.37,68.1 -58.17,68.1 -54.757,71.513 ; -82.345,83.15 -58.145,83.15 ; -82.12,100.475 -57.92,100.475 ; -82.07,85.275 -57.87,85.275 ; -58.182,83.163 -54.77,79.75 -54.77,71.525 ; -57.845,100.4 -54.357,96.913 ; -57.833,85.313 -54.345,88.8 ; -54.345,88.825 -54.345,96.875 ; -46.62,90.2 -46.62,79.225 -44.62,77.225 -36.47,77.225 -36.345,77.225 -34.38,79.19 -34.38,90.15 ; -46.595,90.25 -44.595,92.25 ; -44.57,92.25 -36.42,92.25 ; -36.395,92.225 -34.395,90.225
  text "desinged by erkamozturk" at -55.65,99.1 h1.52
  text "desinged by erkamozturk" at -56.4,67.125 h1.52
  text "desinged by erkamozturk" at -19.9,66.75 h1.52 r90